# EAGLE board BandpassedGainAmpThruholeMounthole (EAGLE 9.6.2)
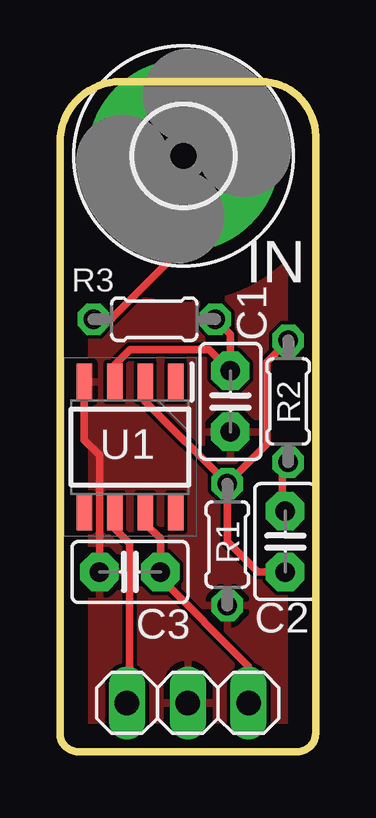
[diagram p0: board, top side]
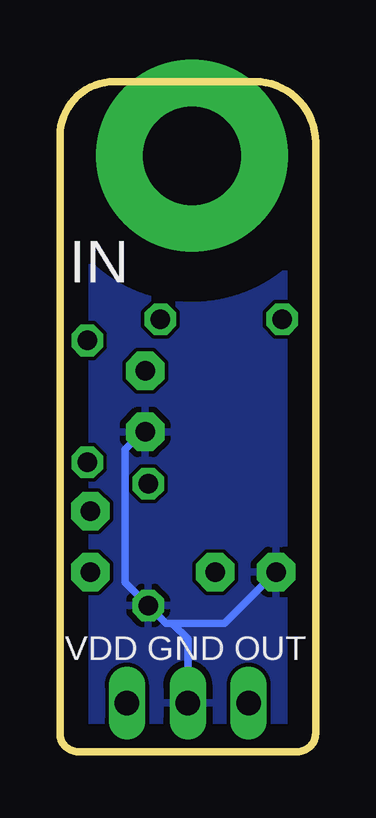
[diagram p1: board, bottom side, seen from below]

Size 10.67 x 27.94 mm. Coordinates in mm from the lower left corner, seen from the top.
Outline: 9.91,0 0.76,0 arc-90 0,0.76 0,25.4 arc-90 2.54,27.94 8.38,27.94 arc-90 10.67,25.65 10.67,0.76 arc-90 9.91,0
Copper layers (1*16): Top 0.035mm / dielectric 1.5mm / Bottom 0.035mm
Design rules "default": minimum track width 6mil, minimum drill 0.35mm, track to track 6mil, track to pad 6mil, pad to pad 6mil, via to via 6mil, smd to smd 6mil, copper to edge 40mil, drill to drill 6mil, minimum pad ring 10mil, minimum via ring 8mil, stop-mask expansion 4mil, vias tented up to drill 0mil, thermal gap 10mil

## Footprints (pad centres in the part's own frame; a part is rotated, then mirrored left to right if it is on the bottom)
C2.5-2 = drill 0.813 pad 1.6 octagon: 1 -1.27,0; 2 1.27,0
4,1-PAD = drill 4.1 pad 8: B4,1 0,0
1X03 = drill 1.016 long: 1 -2.54,0; 2 0,0; 3 2.54,0
0204/5 = drill 0.813 octagon: 1 -2.54,0; 2 2.54,0
SOIC127P600X175-8N = smd 1.528 x 0.65: 1 -2.711,1.905; 2 -2.711,0.635; 3 -2.711,-0.635; 4 -2.711,-1.905; 5 2.711,-1.905; 6 2.711,-0.635; 7 2.711,0.635; 8 2.711,1.905

## Placement (x,y rotation side)
C1  [C2.5-2]  7.11,14.61 90 top
C2  [C2.5-2]  9.4,8.76 90 top
C3  [C2.5-2]  2.92,7.49 180 top
H1  MOUNT-PAD-ROUND4.1  [4,1-PAD]  5.16,24.84 0 top
JP1  [1X03]  5.33,2.03 180 top
R1  [0204/5]  6.98,8.64 90 top
R2  [0204/5]  9.53,14.61 270 top
R3  1K  [0204/5]  3.94,18.03 0 top
U1  OPA202IDR  [SOIC127P600X175-8N]  2.92,12.7 270 top

## Library data of the parts
C1-C3 = capacitor-wima
H1 = holes
JP1 = pinhead
R1-R3 = rcl; SPICEPREFIX: R
U1 = OPA202IDR; AVAILABILITY: In Stock; CHECK_PRICES: https://www.snapeda.com/parts/OPA202IDR/Texas+Instruments/view-part/?ref=eda; DESCRIPTION: Low-noise (0.2 µVPP, 9 nV/√Hz) heavy-capacitive-drive (25 nF) super-beta precision op amp; MF: Texas Instruments; MP: OPA202IDR; PACKAGE: SOIC-8 Texas Instruments; PRICE: None; PURCHASE-URL: https://www.snapeda.com/api/url_track_click_mouser/?unipart_id=4806048&manufacturer=Texas Instruments&part_name=OPA202IDR&search_term=opa202; SNAPEDA_LINK: https://www.snapeda.com/parts/OPA202IDR/Texas+Instruments/view-part/?ref=snap

## Nets
+IN: C1.2 R3.2 U1.3
-IN: C2.1 R1.2 R2.1 U1.2
GND: C1.1 C3.2 JP1.2 R1.1 U1.4
IN: H1.B4,1 R3.1
N$3: C2.2 R2.2
OUT: JP1.3 U1.6
VDD: C3.1 JP1.1 U1.7

## Tracks (layer width: path | path; a pad name or v marks a point on that pad's centre or on a via)
+IN
  Top 0.305: R3.2 7.11,17.4 C1.2 6.22,16.76 2.92,16.76 2.29,16.13 U1.3
-IN
  Top 0.305: R2.1 8.64,16.26 8.64,12.83 R1.2 | R1.2 3.56,14.61 U1.2 | C2.1 8.26,7.49 6.98,8.76 R1.2
GND
  Top 0.305: U1.4 1.02,13 1.65,12.36 C3.2
  Bottom 0.305: C1.1 7.21,13.34 7.95,12.59 7.95,7.06 R1.1 6.24,5.35 5.99,5.35 | C3.2 3.79,5.35 5.99,5.35 | 5.99,5.35 5.33,4.7 JP1.2
  pour Top: -0.89,-0.64 11.43,-0.64 11.43,28.32 -0.89,28.32
  pour Bottom: -0.64,-0.51 -0.64,28.45 11.05,28.45 11.05,-0.51
IN
  Top 0.305: R3.1 2.13,18.03 5.16,21.06 H1.B4,1
N$3
  Top 0.305: R2.2 9.27,11.81 9.27,10.16 C2.2
OUT
  Top 0.305: U1.6 2.29,9.31 2.91,8.69 2.91,2.1 2.85,2.03 JP1.3
VDD
  Top 0.305: U1.7 3.56,9.53 4.19,8.89 C3.1 4.19,7.24 7.87,3.56 JP1.1

## Text on the board
tNames: IN
bNames: IN | VDD GND OUT